# Altium PCB PCB1.PcbDoc
Units mm, origin at the board's own origin, x right, y up, seen from the top; angles counter-clockwise.
Board outline 150 x 70 mm, 2 copper layers (Top Layer, Bottom Layer); 44 components, 21 nets, 162 pads, 48 vias.
Unrouted connection lines stored in the file: 5.
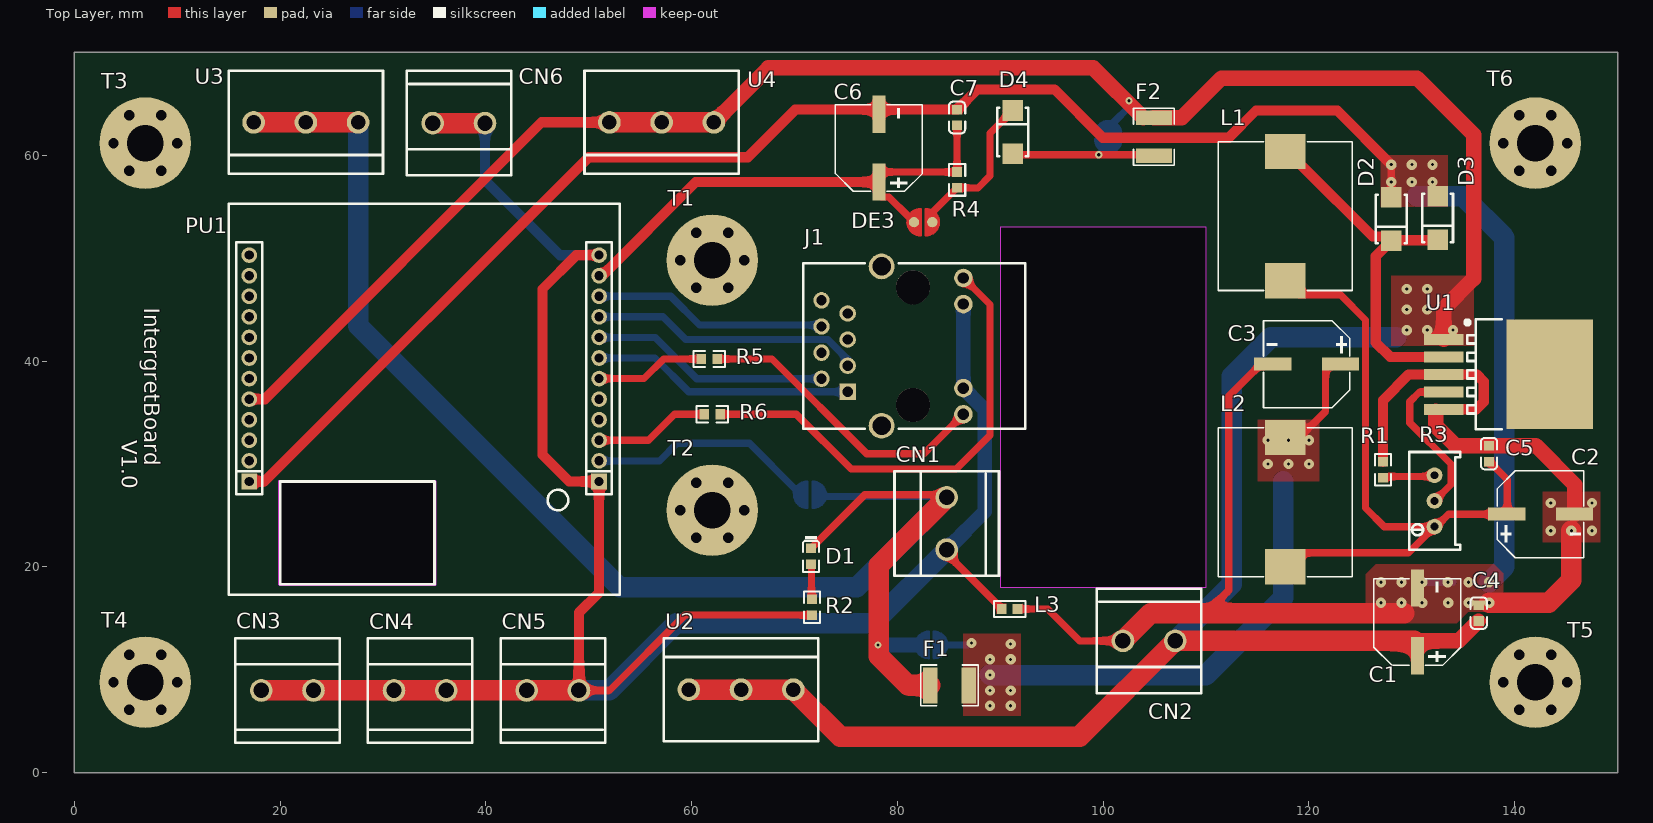
[diagram p0: Top Layer view]
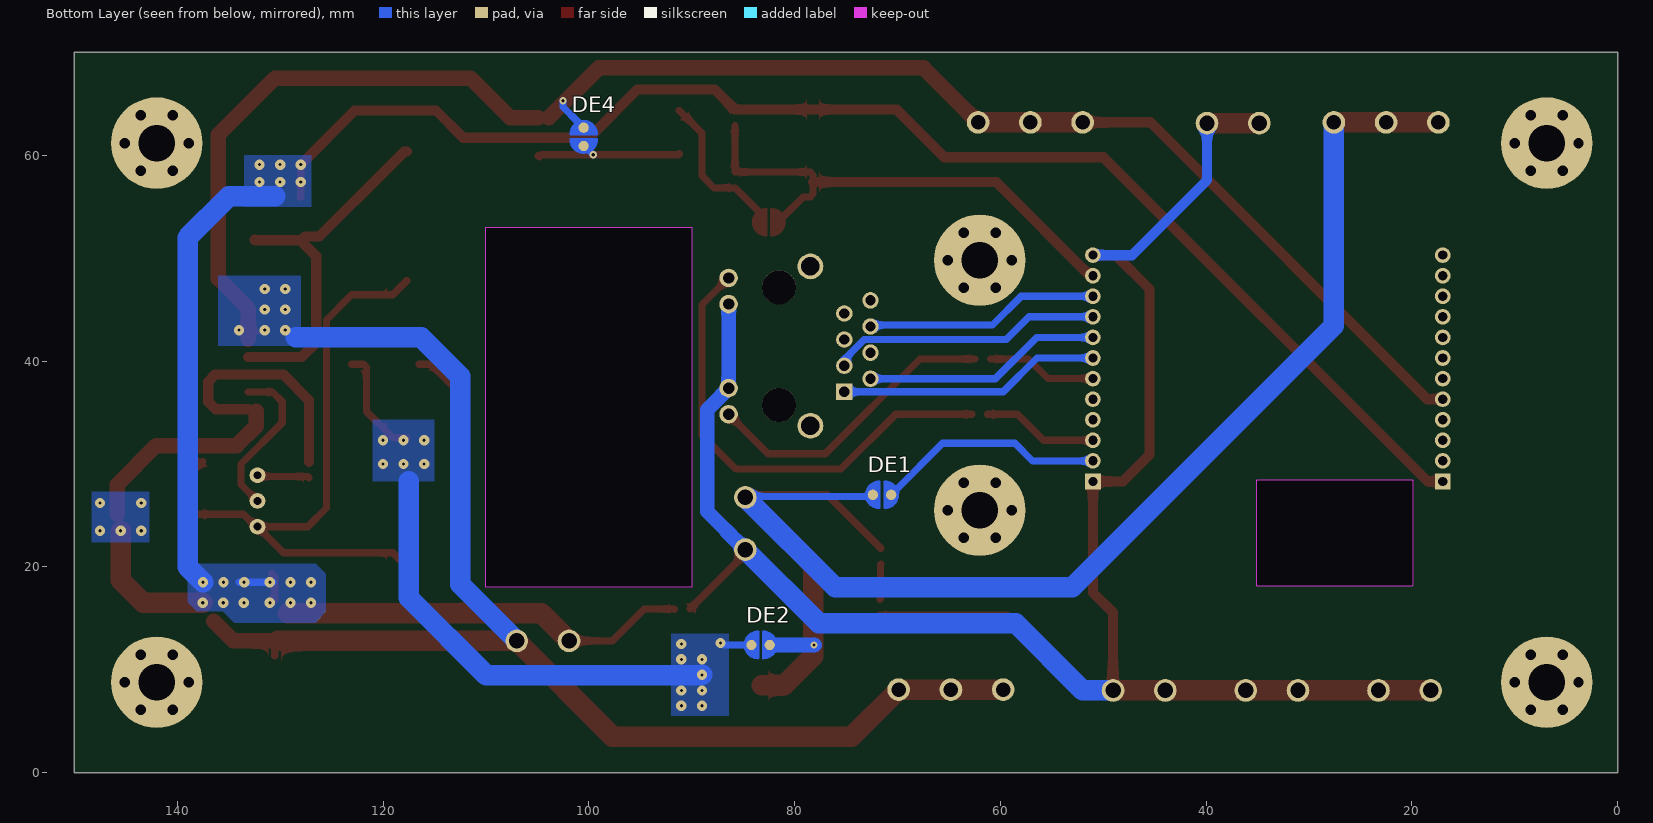
[diagram p1: Bottom Layer view, seen from below]

## Layer stack, top to bottom
Top Solder: solder mask 0.0102, Solder Resist, Dk 3.5
Top Layer: signal copper 0.0356
Dielectric 1: dielectric 0.32, FR-4, Dk 4.8
Bottom Layer: signal copper 0.0356
Bottom Solder: solder mask 0.0102, Solder Resist, Dk 3.5

## Board outline
0,0 0,70 150,70 150,0
cut-out: 19.873,18.294 19.873,28.294 cw(c20,28.294) 19.873,28.294 cw(c20,28.294) 20,28.422 35,28.422 cw(c35,28.294) 35.127,28.294 35.127,18.294 cw(c35,18.294) 35,18.166 20,18.166 cw(c20,18.294)
cut-out: 90,18 110,18 110,53 90,53

## Design rules (kind name [scope] priority, off if disabled: settings)
Clearance [All] p1: gap=0 ignorepadtopadclearanceinfootprint=FALSE
PolygonConnect [All] p1: thpad.connectstyle=Relief thpad.reliefconductorwidth=0.254 thpad.reliefentries=4 thpad.polygonreliefangle="90 Angle" thpad.airgapwidth=0.254 smdpad.connectstyle=Direct smdpad.reliefconductorwidth=0.254 smdpad.reliefentries=4 smdpad.polygonreliefangle="90 Angle" smdpad.airgapwidth=0.254 via.connectstyle=Direct via.reliefconductorwidth=0.254 via.reliefentries=4 via.polygonreliefangle="90 Angle" via.airgapwidth=0.254
RoutingVias [All] p1: holewidth=0.711 width=1.27 viastyle="Through Hole" minholewidth=0.711 minwidth=1.27 maxholewidth=0.711 maxwidth=1.27
SolderMaskExpansion [All] p1: expansion=0.102
Width [All] p1: maxlimit=5 minlimit=0.1 preferedwidth=0.7
30 further rules are at their usual default settings.

## Components (designator, comment, footprint, x,y, rotation, side; value= is the part's Value field where it differs from the comment)
C1 "220uF" 220uF 130.516,14.5 r90 top
C2 "100uF" 100uF 142.5,25 r0 top
C3 "100uF" 100uF 119.8,39.8 r180 top
C4 "100pF (101) 5% 50V" 0603_C 136.5,15.5 r270 top
C5 "100pF (101) 5% 50V" 0603_C 137.5,31 r270 top
C6 "100uF" 100uF 78.311,60.675 r90 top
C7 "12pF (120) 5% 50V" 0603_C 85.8,63.67 r270 top
CN1 "MKDSN1.5/2-5.08" Pin2 85,24.5 r270 top
CN2 "MKDSN1.5/2-5.08" Pin2 104.164,13.011 r0 top
CN3 "MKDSN1.5/2-5.08" Pin2 21,7.769 r180 top
CN4 "MKDSN1.5/2-5.08" Pin2 33.9,7.769 r180 top
CN5 "MKDSN1.5/2-5.08" Pin2 46.8,7.769 r180 top
CN6 "MKDSN1.5/2-5.08" Pin2 37.074,63.331 r0 top
D1 "黄灯 0603" 0603_LED_S1 71.6,21.03 r270 top
D2 "SS56" SMA(DO-214AC)_S1 128,53.8 r90 top
D3 "SS56" SMA(DO-214AC)_S1 132.5,53.9 r90 top
D4 "M7" SMA(DO-214AC)_S1 91.2,62.25 r270 top
DE1 "DEBUG PAD" DEBUG_A 71.5,27 r180 bottom
DE2 "DEBUG PAD" DEBUG_A 83.3,12.4 r0 bottom
DE3 "DEBUG PAD" DEBUG_A 82.5,53.5 r0 top
DE4 "DEBUG PAD" DEBUG_A 100.5,61.789 r90 bottom
F1 "ASMD1812-300" FUSE 85,8.5 r180 top
F2 "ASMD1812-300" FUSE 104.9,61.74 r270 top
J1 "HR911105A_C12074" RJ45 81,41.5 r90 top
L1 "33uH" 220 117.317,54.089 r90 top
L2 "22uH" 220 118.083,26.267 r270 top
L3 "10uH ±10%" 0603_L 90.9,15.9 r0 top
PU1 "PU1" LW-MPA223A 51,28.293 r180 top
R1 "1.2KΩ (1201) ±1%" 0603_R 127.2,29.43 r270 top
R2 "3.3KΩ (3301) ±1%" 0603_R 71.7,16.07 r270 top
R3 "50kADJ" 50kADJ 132.2,26.4 r180 top
R4 "1.2KΩ (1201) ±1%" 0603_R 85.8,57.6 r90 top
R5 "330Ω (3300) ±1%" 0603_R 61.7,40.2 r0 top
R6 "330Ω (3300) ±1%" 0603_R 62,34.824 r0 top
T1 "M3" "M3 140X350" 62,49.795 r0 top
T2 "M3" "M3 140X350" 62,25.5 r0 top
T3 "M3" "M3 140X350" 6.901,61.184 r0 top
T4 "M3" "M3 140X350" 6.901,8.784 r0 top
T5 "M3" "M3 140X350" 142,8.784 r0 top
T6 "M3" "M3 140X350" 142,61.184 r0 top
U1 "LM2596SX-5.0/NOPB" TO-263-5 133.1,38.7 r180 top
U2 "DG500-5.08-03P-14-00A(H)" Pin3 64.8,8.06 r0 top
U3 "DG500-5.08-03P-14-00A(H)" Pin3 22.5,63.2 r180 top
U4 "DG500-5.08-03P-14-00A(H)" Pin3 57.08,63.2 r180 top

## Footprints (in the part's own frame and the unit in brackets; to place one, negate y for a bottom-side part, rotate by r counter-clockwise, add the part's x,y. Pads: shape width x height; smd on the part's side, far side on the other; paste and mask are expansions set on the pad)
50kADJ [mil]
  round 60 hole 30: 1(0,98.43) 2(0,0) 3(0,-98.42)
  silkscreen extent -98,-187 96,187
100uF [mm]
  rect 3.61x1.26 smd: 1(-3.275,0.111) 2(3.315,0.111)
  silkscreen extent -4.18,-4.11 4.22,4.34
220 [mm]
  rect 3.424x3.92 smd: 1(6.267,-0.383) 2(-6.289,-0.383)
  silkscreen extent -7.24,-6.91 7.22,6.14
220uF [mm]
  rect 3.61x1.26 smd: 1(-3.148,-0.016) 2(3.442,-0.016)
  silkscreen extent -4.05,-4.24 4.35,4.21
0603_C [mm]
  rect 0.93x0.98 smd: 1(-0.77,0) 2(0.77,0)
  silkscreen extent -1.54,-0.79 1.54,0.79, body extent -0.8,-0.4 0.8,0.4, height 0.3
0603_L [mm]
  rect 0.93x0.98 smd: 1(-0.77,0) 2(0.77,0)
  silkscreen extent -1.53,-0.79 1.54,0.79, body extent -0.82,-0.41 0.83,0.41, height 0.46
0603_LED_S1 [mm]
  rect 0.93x0.98 smd: A(0.77,0) K(-0.77,0)
  silkscreen extent -1.98,-0.79 1.54,0.79, body extent -0.8,-0.4 0.8,0.4, height 0.6
0603_R [mm]
  rect 0.93x0.98 smd: 1(-0.77,0) 2(0.77,0)
  silkscreen extent -1.54,-0.79 1.54,0.79, body extent -0.85,-0.4 0.85,0.4, height 0.56
DEBUG_A [mm] "调试断点焊盘"
  round 1 smd paste-1: 1(-0.889,0) 2(0.889,0)
  Top Layer region: -0.254,1.27 -0.254,-1.27 -0.762,-1.143 -1.397,-0.508 -1.524,0.254 -1.27,0.762 -1.016,1.016 -0.508,1.27
  Top Layer region: 0.254,1.27 0.254,-1.27 0.762,-1.143 1.397,-0.508 1.524,0.254 1.27,0.762 1.016,1.016 0.508,1.27
  Top Layer lines w0.254: 1.412,0.523 ccw(c0.254,0) 0.254,1.27 0.254,-1.27 ccw(c0.254,0) 1.412,0.523 ; -0.254,-1.27 cw(c-0.254,0) -1.514,-0.158 cw(c-0.254,0) -0.254,1.27 -0.254,-1.27
FUSE [mm]
  rect 1.407x3.499 smd: 1(-1.913,0.022) 2(1.794,0.022)
  silkscreen extent -2.84,-1.96 2.73,2
LW-MPA223A [mil]
  rect 60x60 hole 35.43: 1(0,0) 24(1338.58,0)
  round 60 hole 35.43: 2(0,-78.8) 3(0,-157.5) 4(0,-236.3) 5(0,-315) 6(0,-393.7) 7(0,-472.5) 8(0,-551.2) 9(0,-630) 10(0,-708.7) 11(0,-787.4) 12(0,-866.2) 13(1338.58,-866.2) 14(1338.58,-787.4) 15(1338.58,-708.7) 16(1338.58,-630) 17(1338.58,-551.2) 18(1338.58,-472.5) 19(1338.58,-393.7) 20(1338.58,-315) 21(1338.58,-236.3) 22(1338.58,-157.5) 23(1338.58,-78.8)
  silkscreen extent -79,-1063 1417,433
"M3 140X350" [mil] "M3螺丝孔，孔140Mil，焊盘350Mil"
  round 35 hole 40: 1(-122,0) 1(-61,-105.66) 1(-61,105.66) 1(61,-105.66) 1(61,105.66) 1(122,0)
  round 350 hole 140: 1(0,0)
Pin2 [mm]
  round 2.2 hole 1.5: 1(-2.244,-0.211) 2(2.836,-0.211)
  silkscreen extent -4.78,-5.29 5.38,4.87
Pin3 [mm]
  round 2.2 hole 1.4: 1(-5.08,0) 2(0,0) 3(5.08,0)
  silkscreen extent -7.5,-5 7.5,5
RJ45 [mm]
  rect 1.6x1.6 hole 1: 1(-4.496,5.84)
  round 1.6 hole 1: 2(-3.226,8.38) 3(-1.956,5.84) 4(-0.686,8.38) 5(0.584,5.84) 6(1.854,8.38) 7(3.124,5.84) 8(4.394,8.38)
  round 1.8 hole 1.1: 9(-6.676,-5.41) 10(-4.136,-5.41) 11(4.034,-5.41) 12(6.574,-5.41)
  round 2.5 hole 1.8: SH1(-7.796,2.54) SH2(7.694,2.54)
  round 3.3 hole 3.3 unplated: ""(-5.766,-0.51) ""(5.664,-0.51)
  silkscreen extent -8.1,-11.43 8,10.17
SMA(DO-214AC)_S1 [mm]
  rect 2x2 smd: 1(2.1,0) 2(-2.1,0)
  silkscreen extent -2.35,-1.5 2.35,1.5
TO-263-5 [mm]
  rect 8.4x10.65 smd: 0(-10.3,0)
  rect 3.8x1.05 smd: 1(0,-3.4) 2(0,-1.7) 3(0,0) 4(0,1.7) 5(0,3.4)
  silkscreen extent -5.65,-5.35 -2.1,5.35

## Part data
C1: BOM_Manufacturer=ROQANG, BOM_Manufacturer Part=VT1V221M0810, BOM_Supplier=LCSC, BOM_Supplier Part=C310848, Contributor=LCSC, nameAlias=Capacitance, spicePre=C, spiceSymbolName=VT1V221M0810
C2 C3 C6: BOM_Manufacturer=HONOR, BOM_Manufacturer Part=RVT1H101M0810, BOM_Supplier=LCSC, BOM_Supplier Part=C3352, nameAlias=Capacitance, spicePre=C, spiceSymbolName=RVT1H101M0810
C4 C5: library part "0603 100pF (101) 5% 50V", "贴片电容", Package=0603, SuppliersPartNumber=C14858, ComponentLink1Description=供应商链接, ComponentLink1URL=http://www.szlcsc.com/product/details_15530.html, Supplier=LC
C7: library part "0603 12pF (120) 5% 50V", "贴片电容", Package=0603, SuppliersPartNumber=C38523, ComponentLink1Description=供应商链接, ComponentLink1URL=http://www.szlcsc.com/product/details_39506.html, Supplier=LC
CN1 CN2 CN3 CN4 CN5 CN6: BOM_Manufacturer="Phoenix Contact", BOM_Assembly Type=manualWeld, BOM_Manufacturer Part=MKDSN1.5/2-5.08, BOM_Paste Type=expand, BOM_Supplier=LCSC, BOM_Supplier Part=C91153, spicePre=C, spiceSymbolName=MKDSN1.5/2-5.08
D1: library part "0603 黄灯", "发光二极管", Package=0603, SuppliersPartNumber=C72038, ComponentLink1Description=供应商链接, ComponentLink1URL=http://www.szlcsc.com/product/details_73147.html, Supplier=LC
D2 D3: library part "SMA(DO-214AC) SS54", "二极管", Package=SMA(DO-214AC), SuppliersPartNumber=C22452, ComponentLink1Description=供应商链接, ComponentLink1URL=http://www.szlcsc.com/product/details_23178.html, Supplier=LC
D4: library part "SMA(DO-214AC) M7", "二极管", Package=SMA(DO-214AC), SuppliersPartNumber=C95872, ComponentLink1Description=供应商链接, ComponentLink1URL=http://www.szlcsc.com/product/details_2841.html, Notepad="1N4007 4007 编号C2464 已经停售, 使用新物料编号C95872", Supplier=LC
DE1 DE2 DE3 DE4: library part DEBUG, "调试断点焊盘"
F1 F2: BOM_Manufacturer=JDTFUSE, BOM_Assembly Type=smtWeld, BOM_Manufacturer Part=ASMD1812-300, BOM_Paste Type=recommend, BOM_Supplier=LCSC, BOM_Supplier Part=C135366, Contributor=LCSC, spicePre=F, spiceSymbolName=ASMD1812-300
J1: BOM_Manufacturer=HANRUN, BOM_Manufacturer Part=HR911105A, BOM_Assembly Type=manualWeld, BOM_Paste Type=expand, BOM_Supplier=LCSC, BOM_Supplier Part=C12074, image=//image.lceda.cn/szlcsc/C12074.jpg, spicePre=J, spiceSymbolName=HR911105A_C12074
L1: library part 22uH, BOM_Manufacturer="Sunltech Tech", BOM_Manufacturer Part=SLO1235H220MTT, BOM_Supplier=LCSC, BOM_Supplier Part=C364099, Contributor=LCSC, nameAlias=Inductance, spicePre=L, spiceSymbolName=SLO1235H220MTT
L2: BOM_Manufacturer="Sunltech Tech", BOM_Manufacturer Part=SLO1235H220MTT, BOM_Supplier=LCSC, BOM_Supplier Part=C364099, Contributor=LCSC, nameAlias=Inductance, spicePre=L, spiceSymbolName=SLO1235H220MTT
L3: library part "0603 10uH 10%", "贴片电感", Package=0603, SuppliersPartNumber=C1035, ComponentLink1Description=供应商链接, ComponentLink1URL=http://www.szlcsc.com/product/details_1387.html, Supplier=LC
PU1: library part LW-MPA223A
R1 R4: library part "0603 1.2KΩ (1201) 1%", "贴片电阻", Package=0603, SuppliersPartNumber=C22765, ComponentLink1Description=供应商链接, ComponentLink1URL=http://www.szlcsc.com/product/details_23492.html, Supplier=LC
R2: library part "0603 3.3KΩ (3301) 1%", "贴片电阻", Package=0603, SuppliersPartNumber=C22978, ComponentLink1Description=供应商链接, ComponentLink1URL=http://www.szlcsc.com/product/details_23705.html, Supplier=LC
R3: BOM_Manufacturer="Chengdu Guosheng Tech", BOM_Manufacturer Part=3296W-1-503, Resistance(Ohms)=50K, BOM_Assembly Type=manualWeld, BOM_Paste Type=expand, BOM_Supplier=LCSC, BOM_Supplier Part=C118911, Contributor=LCSC, nameAlias="Resistance (Ohms)", spicePre=R, spiceSymbolName=3296W-1-503
R5 R6: library part "0603 330Ω (3300) 1%", "贴片电阻", Package=0603, SuppliersPartNumber=C23138, ComponentLink1Description=供应商链接, ComponentLink1URL=http://www.szlcsc.com/product/details_23865.html, Supplier=LC
T1 T2 T3 T4 T5 T6: "铜柱孔"
U1: library part LM2596SX-5.0/NOPB_[C10002], "DC-DCоƬ", Package=TO-263-5, SuppliersPartNumber=C10002, ComponentLink1Description=供应商链接, ComponentLink1URL=http://www.szlcsc.com/product/details_10538.html, Supplier=LC
U2 U3 U4: BOM_Manufacturer=DEGSON, BOM_Assembly Type=manualWeld, BOM_Manufacturer Part=DG500-5.08-03P-14-00A(H), BOM_Paste Type=expand, BOM_Supplier=LCSC, BOM_Supplier Part=C581322, Contributor=LCSC, spicePre=U, spiceSymbolName=DG500-5.08-03P-14-00A(H)

## Via types
v1: diameter 1, hole 0.305, Top Layer to Bottom Layer, tented both sides, 45 vias
v2: diameter 0.7, hole 0.305, Top Layer to Bottom Layer, tented both sides, 3 vias

## Nets (pads, with @x,y where several pads share a name; then routed paths per layer and width w, separated by ;. In a path a pad name is that pad's centre, name@x,y a point inside that pad or via, vN(x,y) a via of type N, cw(c..) or ccw(c..) an arc to the next point about the centre after c; other vN are vias at no path point)
+5: CN1.1 D1.A DE1.1 DE2.1 F1.2 U3.1 U3.2 U3.3 | length 158
  Top Layer w0.7: 71.6,21.8 71.625,21.8 76.825,27 84.533,27 CN1.1 ; 79.5,21.5 79.545,21.5
  Top Layer w2: U3.3 U3.2 U3.1 ; F1.2 81.022,8.478 78.2,11.3 78.2,20.155 79.545,21.5 CN1.1
  Bottom Layer w0.7: DE1.1 72.47,27 72.628,26.842 73.014,26.842 84.691,26.842 CN1.1 ; 81.776,12.4 DE2.1
  Bottom Layer w1.5: v2(78.1,12.4) 81.776,12.4
  Bottom Layer w2: U3.1 27.58,43.42 53,18 76.045,18 CN1.1
+12: C1.1 C4.2 CN2.2 DE4.2 F2.1 PU1.20 U1.1 U2.1 U2.2 U2.3 U4.1 U4.2 U4.3 | length 293
  Top Layer w0.7: F2.1@103.876,63.653 F2.1 ; C1.1@130.251,12.8 C1.1@130.531,12.52 ; C1.1 C1.1@130.531,12.52 ; C1.1@130.811,12.807 130.531,12.527 C1.1@130.531,12.52 ; C4.2@136.475,14.73 C4.2
  Top Layer w1: PU1.20 18.494,36.294 45.4,63.2 U4.3
  Top Layer w1.5: U4.1 67.46,68.5 99.029,68.5 F2.1@103.876,63.653 ; F2.1 107.653,63.653 111.5,67.5 130.5,67.5 136,62 136,48 133.1,45.1 U1.1 ; C1.1@130.811,12.807 134.552,12.807 C4.2@136.475,14.73
  Top Layer w2: U4.3 U4.2 U4.1 ; U2.1 U2.2 U2.3 74.44,3.5 97.7,3.5 CN2.2 C1.1@130.251,12.8
  Bottom Layer w0.7: DE4.2 101.023,63.201 102.5,64.678 v2(102.5,65.3)
  Bottom Layer w2: CN2.2 112.5,18.3 112.5,38.5 116.294,42.294 128.5,42.294
  other v1: 129.5,43 131.5,43 134,43 129.5,45 131.5,45 129.5,47 131.5,47
GND: C1.2 C2.2 C3.2 C4.1 C5.1 C6.2 C7.1 CN1.2 CN2.1 CN3.1 CN3.2 CN4.1 CN4.2 CN5.1 CN5.2 CN6.1 CN6.2 D2.1 D3.1 J1.10 J1.11 L3.1 L3.2 PU1.1 PU1.12 PU1.24 R1.1 R2.2 U1.3 U1.5 | length 519.4
  Top Layer w0.7: CN5.1 52.002,7.98 59.322,15.3 R2.2 ; CN1.2 84.789,21.266 90.13,15.925 L3.1 ; L3.2@91.67,15.875 L3.2 94.6,15.9 97.7,12.8 CN2.1 ; 110,15.5 112.2,17.7 112.2,36.579 115.31,39.689 C3.2 ; 112.5,15.5 112.621,15.621 ; v1(128,59.09) v1(128,57.4) D2.1 D2.1@128.05,55.95 ; C1.2@130.764,17 130.531,16.767 C1.2 130.531,19 130.811,19.28 C1.2@130.811,19.397 ; U1.5@132.34,35.125 132.515,35.3 U1.5 ; D3.1@132.45,55.95 D3.1 ; C2.2@145.8,25.096 C2.2
  Top Layer w1: PU1.24 18.472,28.293 49.978,59.8 65.44,59.8 70.08,64.44 C7.1 85.825,64.44 87.785,66.4 95.266,66.4 99.966,61.7 112.2,61.7 114.85,64.35 122.74,64.35 v1(128,59.09) ; CN5.1 49.044,15.544 51,17.5 PU1.1 48.107,28.293 45.5,30.9 45.5,47 48.795,50.295 PU1.12 ; R1.1 127.2,36.2 129.7,38.7 U1.3 136.3,38.7 137,38 137,36.025 136.275,35.3 U1.5
  Top Layer w1.5: U1.5@132.34,35.125 132.34,33.66 134.23,31.77 C5.1 142.045,31.77 145.815,28 C2.2
  Top Layer w2: CN3.2 CN3.1 CN4.2 CN4.1 CN5.2 CN5.1 ; CN6.1 CN6.2 ; CN2.1 104.62,15.5 110,15.5 112.5,15.5 129.264,15.5 ; v1(137.525,16.5) 143.3,16.5 145.5,18.7 v1(145.5,23.5)
  Bottom Layer w0.7: v1@130.7,18.5 v1@134,18.5
  Bottom Layer w1: CN6.2 39.91,57.59 47.205,50.295 PU1.12
  Bottom Layer w1.4: CN1.2 88.5,25.375 88.5,35.274 J1.10 J1.11
  Bottom Layer w2: CN5.1 51.98,7.98 58.5,14.5 77.625,14.5 CN1.2 ; 130.5,56 135,56 139,52 139,20 v1(137.5,18.5)
  other v1: 127,16.5 129,16.5 131,16.5 133.525,16.5 135.525,16.5 127,18.5 129,18.5 131,18.5 133.5,18.5 135.5,18.5 143.5,23.5 147.5,23.5 143.5,26.2 147.5,26.2 130,57.4 132,57.4 130,59.09 132,59.09
NetC2_1: C2.1 C5.2 L1.2 L2.1 R3.1 | length 64.6
  Top Layer w0.7: L2.1 119.062,21.362 129.662,21.362 R3.1 ; L1.2 119.062,46.438 123.062,46.438 125.5,44 125.5,25.715 127.315,23.9 R3.1 ; C5.2 137.525,30.23 139.281,28.474 139.281,25.168 C2.1 133.551,25.111 132.34,23.9 R3.1
NetC3_1: C3.1 DE2.2 F1.1 L2.2 | length 56.9
  Top Layer w0.7: L2.2 119.056,32.556 121.62,35.12 121.62,39.409 121.9,39.689 C3.1
  Bottom Layer w0.7: DE2.2 84.824,12.4 86.908,12.4 87.108,12.6 v1(87.189,12.6)
  Bottom Layer w2: v1(89,9.5) 89.057,9.443 109.943,9.443 117.5,17 117.5,28.293
  other v1: 89,6.5 91,6.5 89,7.98 91,7.98 89,11 91,11 91,12.5 116,30 118,30 120,30 116,32.294 118,32.294 120,32.294
NetD1_K: D1.K R2.1 | length 3.5
  Top Layer w0.7: 71.6,20.26 71.65,20.21 71.65,16.89 R2.1
NetD2_2: D2.2 D3.2 L1.1 U1.2 | length 36.1
  Top Layer w1: L1.1 117.948,60.356 119.31,58.994 126.198,52.106 127.594,52.106 D2.2 ; D3.2 132.45,51.75 128.05,51.75 D2.2 ; U1.2 127.895,40.4 126.5,41.795 126.5,50.2 D2.2
NetD4_1: D4.1 DE4.1 F2.2 | length 15.2
  Top Layer w0.7: D4.1 91.302,60.048 104.566,60.048 104.795,59.819 F2.2
  Bottom Layer w0.7: v2(99.567,60.048) 99.923,60.404 100.419,60.9 DE4.1
NetD4_2: D4.2 DE3.2 R4.1 | length 15.3
  Top Layer w0.7: DE3.2 83.42,53.531 83.42,54.475 83.484,54.539 85.775,56.83 R4.1 87.83,56.83 89,58 89,62.15 D4.2
NetDE1_2: DE1.2 PU1.2 | length 22.4
  Bottom Layer w0.7: PU1.2 56.875,30.295 58.58,32 65.611,32 70.088,27.523 DE1.2
NetJ1_1: J1.1 PU1.7 | length 25.5
  Bottom Layer w0.7: PU1.7 56.425,40.295 59.716,37.004 J1.1
NetJ1_2: J1.2 PU1.8 | length 23.3
  Bottom Layer w0.7: PU1.8 56.465,42.294 60.484,38.274 J1.2
NetJ1_3: J1.3 PU1.9 | length 26.5
  Bottom Layer w0.7: PU1.9 57.205,44.295 59.416,42.084 73.23,42.084 75.16,40.154 J1.3
NetJ1_6: J1.6 PU1.10 | length 22.8
  Bottom Layer w0.7: PU1.10 57.964,46.294 60.759,43.5 72.474,43.5 J1.6
NetJ1_9: J1.9 R5.2 | length 29.3
  Top Layer w0.7: R5.2 67.8,40.2 77.011,30.989 82.575,30.989 J1.9
NetJ1_12: J1.12 R6.2 | length 46.2
  Top Layer w0.7: R6.2 70.176,34.824 75.5,29.5 85.706,29.5 89,32.794 89,45.484 J1.12
NetPU1_3: PU1.3 R6.1 | length 11.3
  Top Layer w0.7: PU1.3 55.794,32.294 58.324,34.824 R6.1
NetPU1_6: PU1.6 R5.1 | length 10.7
  Top Layer w0.7: PU1.6 55.373,38.293 57.28,40.2 R5.1
NetR1_2: R1.2 R3.3 | length 5.1
  Top Layer w0.7: R1.2 127.315,28.775 132.075,28.775 R3.3
NetR3_2: R3.2 U1.4 | length 15.7
  Top Layer w0.7: R3.2 133.8,28 133.8,29.994 129.79,34.004 129.79,36.039 130.751,37 U1.4
Vplc: C6.1 C7.2 DE3.1 PU1.11 R4.2 | length 49.6
  Top Layer w0.7: PU1.11 PU1.11@51.293,48.293 ; DE3.1 81.088,54.023 79.166,55.945 78.48,55.945 78.2,56.225 C6.1 78.2,58.09 78.48,58.37 R4.2 C7.2
  Top Layer w1: PU1.11@51.293,48.293 60.4,57.4 C6.1
pads on no net: J1. J1.4 J1.5 J1.7 J1.8 J1.SH1 J1.SH2 PU1.4 PU1.5 PU1.13 PU1.14 PU1.15 PU1.16 PU1.17 PU1.18 PU1.19 PU1.21 PU1.22 PU1.23 T1.1 T2.1 T3.1 T4.1 T5.1 T6.1 U1.0

## Polygon pours and split planes (outlines as drawn)
GND on Top Layer "Top Layer-GND" (solid, pour order 24): 142.7,27.3 142.7,22.4 148.3,22.4 148.3,27.3
GND on Top Layer "Top Layer-GND 1" (solid, pour order 16): 126.5,14.5 134.379,14.5 135.5,15.621 138.023,15.621 138.901,16.5 138.901,19.359 138,20.26 126.48,20.26 125.5,19.28 125.5,15.621
GND on Top Layer "Top Layer-GND 2" (solid, pour order 12): 127,55 133.5,55 133.5,60 127,60
+12 on Top Layer "Top Layer-+12" (solid, pour order 10): 128,48.293 128,41.5 136,41.5 136,48.293
NetC3_1 on Top Layer "Top Layer-NetC3_1" (solid, pour order 6): 115,34.295 115,28.293 121,28.293 121,34.295
NetC3_1 on Top Layer "Top Layer-NetC3_1 1" (solid, pour order 0): 86.41,13.5 86.41,5.5 92,5.5 92,13.5
GND on Bottom Layer "Bottom Layer-GND 1" (solid, pour order 26): 142.7,27.3 142.7,22.4 148.3,22.4 148.3,27.3
GND on Bottom Layer "Top Layer-GND 1" (solid, pour order 22): 126.559,14.542 134.438,14.542 135.559,15.664 138.082,15.664 138.96,16.542 138.96,19.401 138.059,20.302 126.539,20.302 125.559,19.322 125.559,15.664
no net on Bottom Layer "Bottom Layer-No Net" (solid, pour order 20): 138.901,18
GND on Bottom Layer "Bottom Layer-GND" (solid, pour order 14): 127,60 127,55 133.5,55 133.5,60
+12 on Bottom Layer "Bottom Layer-+12" (solid, pour order 8): 136,41.5 128,41.5 128,48.293 136,48.293
NetC3_1 on Bottom Layer "Bottom Layer-NetC3_1" (solid, pour order 4): 115,34.295 115,28.293 121,28.293 121,34.295
NetC3_1 on Bottom Layer "Bottom Layer-NetC3_1 1" (solid, pour order 2): 86.41,13.5 86.41,5.5 92,5.5 92,13.5

## Silkscreen, mask and mechanical layers (free items; w line width, h text height)
Top Overlay:
  text "IntergretBoard" at 6.8,45.2 h1.52 r270
  text "V1.0" at 4.6,32.3 h1.52 r270
Mechanical 1:
  lines w0.254: 30,28.294 35,28.294 ; 35,28.294 35,18.294 20,18.294 20,28.294 35,28.294 ; 0,0 0,70 150,70 150,0 0,0 ; 90,18 90,53 110,53 110,18 90,18